# EAGLE board adapter_sf (EAGLE 5.12)
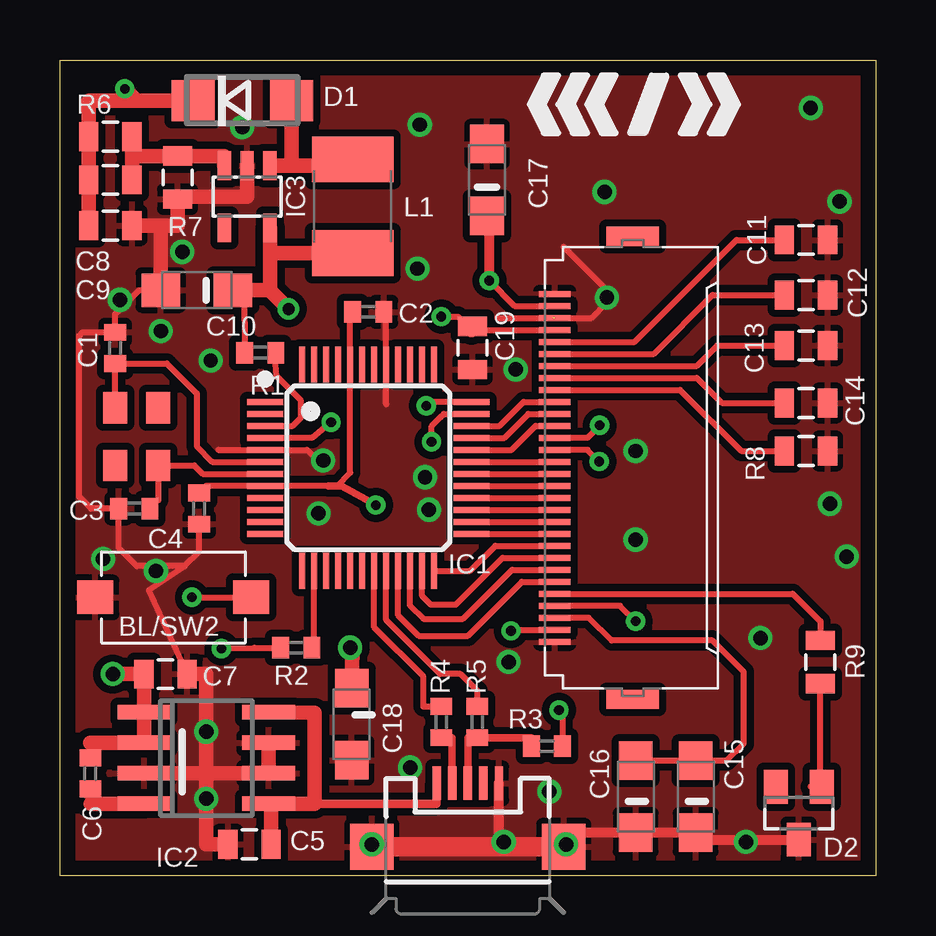
[diagram p0: board, top side]
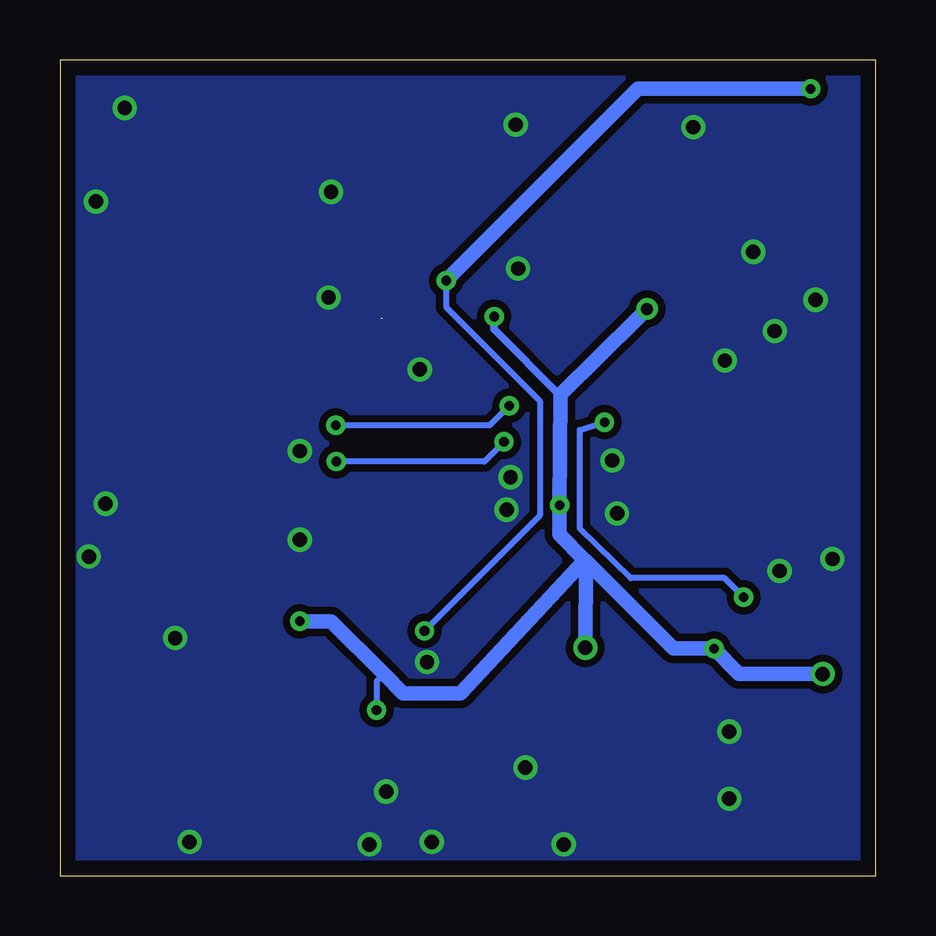
[diagram p1: board, bottom side, seen from below]

Size 34 x 34 mm. Coordinates in mm from the lower left corner, seen from the top.
Outline: 34,34 34,0 0,0 0,34 34,34
Copper layers (1*16): Top 0.035mm / dielectric 1.5mm / Bottom 0.035mm
Design rules "default *": minimum track width 9mil, minimum drill 0.4mm, track to track 8mil, track to pad 8mil, pad to pad 8mil, via to via 8mil, smd to smd 8mil, copper to edge 25mil, drill to drill 8mil, minimum pad ring 10mil, minimum via ring 8mil, stop-mask expansion 4mil, vias tented up to drill 30mil, thermal gap 10mil

## Footprints (pad centres in the part's own frame; a part is rotated, then mirrored left to right if it is on the bottom)
SWITCH_MCTAEF = smd 1.5 x 1.4: 1 -3.25,0; 2 3.25,0
C0402 = smd 0.7 x 0.9: 1 -0.65,0; 2 0.65,0
0805 = smd 0.8 x 1.2: 1 -0.9,0; 2 0.9,0
SMC_A = smd 1.6 x 1.4: + -1.5,0; - 1.5,0
DO214AC = smd 1.8 x 1.7: A 2.05,0; C -2.05,0
SOT23 = smd 1 x 1.4: 1 -0.95,-1.1; 2 0.95,-1.1; 3 0,1.1
LQFP48 = smd 1.5 x 0.25: 1 -4.3,2.75; 2 -4.3,2.25; 3 -4.3,1.75; 4 -4.3,1.25; 5 -4.3,0.75; 6 -4.3,0.25; 7 -4.3,-0.25; 8 -4.3,-0.75; 9 -4.3,-1.25; 10 -4.3,-1.75; 11 -4.3,-2.25; 12 -4.3,-2.75; 25 4.3,-2.75; 26 4.3,-2.25; 27 4.3,-1.75; 28 4.3,-1.25; 29 4.3,-0.75; 30 4.3,-0.25; 31 4.3,0.25; 32 4.3,0.75; 33 4.3,1.25; 34 4.3,1.75; 35 4.3,2.25; 36 4.3,2.75 | smd 0.25 x 1.5: 13 -2.75,-4.3; 14 -2.25,-4.3; 15 -1.75,-4.3; 16 -1.25,-4.3; 17 -0.75,-4.3; 18 -0.25,-4.3; 19 0.25,-4.3; 20 0.75,-4.3; 21 1.25,-4.3; 22 1.75,-4.3; 23 2.25,-4.3; 24 2.75,-4.3; 37 2.75,4.3; 38 2.25,4.3; 39 1.75,4.3; 40 1.25,4.3; 41 0.75,4.3; 42 0.25,4.3; 43 -0.25,4.3; 44 -0.75,4.3; 45 -1.25,4.3; 46 -1.75,4.3; 47 -2.25,4.3; 48 -2.75,4.3
SOIC8 = smd 0.6 x 2.2: 1 -1.905,-2.6; 2 -0.635,-2.6; 3 0.635,-2.6; 4 1.905,-2.6; 5 1.905,2.6; 6 0.635,2.6; 7 -0.635,2.6; 8 -1.905,2.6
SOT23-5L = smd 0.55 x 1.2: 1 -0.95,-1.3; 2 0,-1.3; 3 0.95,-1.3; 4 0.95,1.3; 5 -0.95,1.3
XF2H-3015-1LW = smd 1.3 x 0.25: 1 3.175,7.25; 2 3.175,6.75; 3 3.175,6.25; 4 3.175,5.75; 5 3.175,5.25; 6 3.175,4.75; 7 3.175,4.25; 8 3.175,3.75; 9 3.175,3.25; 10 3.175,2.75; 11 3.175,2.25; 12 3.175,1.75; 13 3.175,1.25; 14 3.175,0.75; 15 3.175,0.25; 16 3.175,-0.25; 17 3.175,-0.75; 18 3.175,-1.25; 19 3.175,-1.75; 20 3.175,-2.25; 21 3.175,-2.75; 22 3.175,-3.25; 23 3.175,-3.75; 24 3.175,-4.25; 25 3.175,-4.75; 26 3.175,-5.25; 27 3.175,-5.75; 28 3.175,-6.25; 29 3.175,-6.75; 30 3.175,-7.25 | smd 2.2 x 0.8: M1 -0.075,9.65; M2 -0.075,-9.65
L1812 = smd 1.9 x 3.4: 1 -1.95,0; 2 1.95,0
MT = smd 1.3 x 1: 1 1.2,0.9; 2 -1.2,0.9; 3 -1.2,-0.9; 4 1.2,-0.9
R0402 = smd 0.7 x 0.9: 1 -0.65,0; 2 0.65,0
USB-MICROB = smd 0.35 x 1.4: D+ 0,2.65; D- -0.65,2.65; GND 1.3,2.65; ID 0.65,2.65; VBUS -1.3,2.65 | smd 1.8 x 1.9: MT1 -4,0; MT2 4,0; MT3 -4,0; MT4 4,0

## Placement (x,y rotation side)
BL/SW2  SWITCH_MCTAEF  [SWITCH_MCTAEF]  4.72,11.6 0 top
C1  22pF  [C0402]  2.3,22 270 top
C2  100nF  [C0402]  12.85,23.5 180 top
C3  22pF  [C0402]  3.1,15.3 0 top
C4  100nF  [C0402]  5.8,15.3 90 top
C5  1µF  [0805]  7.9,1.3 180 top
C6  10nF  [C0402]  1.26,4.26 90 top
C7  1µF  [0805]  4.4,8.4 0 top
C8  220pF  [0805]  2.1,29 0 top
C9  1µF  [0805]  2.1,27.1 0 top
C10  10µF  [SMC_A]  5.7,24.4 180 top
C11  1µF  [0805]  31.1,26.5 180 top
C12  1µF  [0805]  31.1,24.2 180 top
C13  1µF  [0805]  31.1,22.1 180 top
C14  1µF  [0805]  31.1,19.7 180 top
C15  10µF  [SMC_A]  26.5,3.3 270 top
C16  10µF  [SMC_A]  24,3.3 270 top
C17  10µF  [SMC_A]  17.8,29 90 top
C18  10µF  [SMC_A]  12.16,6.31 270 top
C19  1µF  [0805]  17.2,22 270 top
D1  B140F  [DO214AC]  7.6,32.3 0 top
D2  [SOT23]  30.8,2.6 180 top
IC1  [LQFP48]  12.85,17 0 top
IC2  LT1763CS8-3.3  [SOIC8]  6.1,4.9 270 top
IC3  LM27313  [SOT23-5L]  7.8,28.3 180 top
J1  XF2-3015-1LW  [XF2H-3015-1LW]  23.8,17 180 top
L1  [L1812]  12.2,27.9 90 top
Q1  12Mhz  [MT]  3.2,18.3 270 top
R1  15k  [R0402]  8.35,21.8 180 top
R2  15k  [R0402]  9.85,9.5 180 top
R3  15k  [R0402]  20.3,5.4 0 top
R4  33R  [R0402]  15.9,6.4 270 top
R5  33R  [R0402]  17.4,6.4 270 top
R6  100k  [0805]  2.1,30.8 180 top
R7  10k  [0805]  4.9,29.1 90 top
R8  1M  [0805]  31.1,17.7 0 top
R9  50R  [0805]  31.7,8.9 270 top
X1  USB-MICROB  [USB-MICROB]  17,1.2 0 top

## Library data of the parts
BL/SW2 IC3 Q1 = seb
C1-C4 C6 C10 C15-C18 R1-R5 = rcl
C5 C7-C9 C11-C14 C19 R6-R9 X1 = SparkFun
D1 D2 = diode
IC1 = microbuilder; DIGIKEY#: 568-4945-ND; MANF: NXP; MANF#: LPC1343FBD48,151
IC2 = linear-technology
J1 = con-omron; OC_FARNELL: unknown; OC_NEWARK: unknown
L1 = resistor

## Nets
+3V3: C2.2 C4.2 C6.2 C7.1 C10.+ C18.+ C19.1 IC1.8 IC1.44 IC2.1 IC2.2 IC3.5 J1.4 J1.27 L1.1 R1.2 R2.2 R3.2
+5V: C5.1 IC2.5 IC2.8 X1.VBUS
+12V: C8.1 C9.1 C17.+ D1.C J1.2 J1.29 R6.2
BS1: IC1.35 J1.17
BS2: IC1.36 J1.18
CS: IC1.32 J1.19
D0: IC1.29 J1.14
D1: IC1.28 J1.13
D2: IC1.27 J1.12
D3: IC1.26 J1.11
D4: IC1.25 J1.10
D5: IC1.24 J1.9
D6: IC1.23 J1.8
D7: IC1.22 J1.7
D8: IC1.21 J1.6
D/C: IC1.33 J1.20
E: IC1.30 J1.15
GND: BL/SW2.1 C1.1 C2.1 C3.1 C4.1 C5.2 C7.2 C9.2 C10.- C11.1 C12.1 C13.1 C14.1 C15.- C16.- C17.- C18.- C19.2 D2.3 IC1.5 IC1.41 IC2.3 IC2.6 IC2.7 IC3.2 J1.1 J1.28 J1.30 R7.1 R8.2 X1.GND X1.MT1 X1.MT2 X1.MT3 X1.MT4
IREF: J1.22 R8.1
N$1: D1.A IC3.1 L1.2
N$2: D2.1 R9.2
N$3: C3.2 IC1.7 Q1.1
N$4: C1.2 IC1.6 Q1.3
N$5: C6.1 IC2.4
N$6: C8.2 IC3.3 R6.1 R7.2
N$7: IC1.3 R1.1
N$10: R3.1 R5.2 X1.D+
N$11: R4.2 X1.D-
N$12: IC1.14 R2.1
N$14: IC1.19 R4.1
N$21: BL/SW2.2 IC1.4
N$24: IC1.20 R5.1
R/W: IC1.31 J1.16
RES: IC1.34 J1.21
VBREF: C11.2 J1.26
VCOMH: C15.+ C16.+ J1.3
VPA: C12.2 J1.25
VPB: C13.2 J1.24
VPC: C14.2 J1.23
VSL: J1.5 R9.1

## Tracks (layer width: path | path; a pad name or v marks a point on that pad's centre or on a via)
+3V3  (via drill 0.4, 0.5, 0.6)
  Top 0.254: J1.27 17.15,22.75 16.6,23.3 v15.9,23.3 | C2.2 12.1,23.4 IC1.44 12.1,16.8 11.55,16.25 | C4.2 6.1,16.25 IC1.8 11.2,16.25 | J1.4 23.35,11.25 v24,10.6 | R2.2 8.09,9.5 v6.73,9.46 | R3.2 20.95,6.75 v20.8,6.9 | R1.2 7.67,24.43 8.82,24.32 | C6.2 1.25,4.95 1.25,5.54
  Top 0.305: 11.2,16.25 11.55,16.25 11.74,16.25 v13.17,15.45
  Top 0.6: C7.1 v2.2,8.4
  Top 0.61: 8.75,24.4 IC3.5 8.75,25.95 L1.1 | 8.75,24.4 C10.+ | IC2.1 3.6,6.8 | 1.25,5.54 IC2.2 IC2.1 | IC2.1 C7.1 | 8.75,24.4 8.82,24.32 v9.53,23.62 | C18.+ 12.2,9.4 v12.1,9.5 | 17.15,22.75 17.15,22.85 C19.1
  Bottom 0.254: v6.73,9.46 7.43,9.47 8.43,9.47 | v20.8,6.9 20.8,8.1 20.5,8.4
  Bottom 0.305: v13.17,15.45 13.17,14.35 13.18,14.22 | v15.9,23.3 15.9,22.77 13.13,20
  Bottom 0.61: v24,10.6 22.7,10.6 20.5,8.4 19.7,7.6 17.3,7.6 12.11,13.16 12.13,13.16 | v9.53,23.62 9.9,23.25 13.12,20.07 13.13,20 v13.17,15.45 13.18,14.22 12.13,13.16 | v2.2,8.4 5.7,8.4 v6.73,9.46 8.43,9.47 12.08,13.12 | 12.08,13.12 12.13,13.16 | v12.1,9.5 12.08,13.12
+5V
  Top 0.35: 10.5,3 10.62,3.53 | X1.VBUS 15.7,3 10.61,2.98
  Top 0.61: C5.1 8.8,3 IC2.5 10.5,3 10.61,2.98 10.61,6.78 IC2.8
+12V  (via drill 0.4)
  Top 0.254: J1.29 18.95,23.75 v17.9,24.8 | v18.8,10.2 18.85,10.25 J1.2
  Top 0.406: C17.+ 17.9,27.4 v17.9,24.8
  Top 0.61: C9.1 C8.1 R6.2 1.2,32.3 D1.C 3.2,32.3 v2.7,32.8
  Bottom 0.254: v18.8,10.2 17.9,11.1 13.99,15.01 13.99,19.79 17.9,23.7 v17.9,24.8
  Bottom 0.61: v2.7,32.8 9.9,32.8 v17.9,24.8
BS1  (via drill 0.4)
  Top 0.254: J1.17 21.99,17.75 v22.48,17.26 | v15.49,18.08 15.49,18.73 15.87,19.11 16.01,19.25 IC1.35
  Bottom 0.254: v22.48,17.26 16.31,17.26 v15.49,18.08
BS2  (via drill 0.4)
  Top 0.254: J1.18 21.98,18.25 v22.5,18.77 | v15.27,19.59 15.43,19.75 IC1.36
  Bottom 0.254: v22.5,18.77 16.09,18.77 v15.27,19.59
CS
  Top 0.254: J1.19 19.82,18.75 18.82,17.75 IC1.32
D0
  Top 0.254: IC1.29 J1.14
D1
  Top 0.254: IC1.28 J1.13
D2
  Top 0.254: IC1.27 J1.12
D3
  Top 0.254: IC1.26 J1.11
D4
  Top 0.254: IC1.25 J1.10
D5
  Top 0.254: J1.9 18.15,13.75 17.1,12.7 IC1.24
D6
  Top 0.254: J1.8 18.45,13.25 16.5,11.3 15.45,11.3 15.1,11.65 IC1.23
D7
  Top 0.254: J1.7 18.85,12.75 16.8,10.7 15.15,10.7 14.6,11.25 IC1.22
D8
  Top 0.254: J1.6 19.25,12.25 17,10 14.95,10 14.1,10.85 IC1.21
D/C
  Top 0.254: J1.20 19.52,19.25 18.52,18.25 IC1.33
E
  Top 0.254: IC1.30 J1.15
GND  (via drill 0.6)  (1 unrouted)
  Top 0.254: 13.6,19.65 IC1.41 13.6,23.4 C2.1 | 5.2,12.9 3.2,12.9 2.45,13.65 C3.1 1.3,15.3 0.8,15.8 0.8,22.5 0.95,22.65 C1.1 2.3,23.4 3.3,24.4 C10.- | 5.2,12.9 5.8,13.5 C4.1 | 5.2,12.9 3.7,11.9 C7.2 | J1.28 22.15,23.25 22.8,23.9 22.8,24.4 21,26.2 | 18.23,23.25 20.55,23.25 | 6.6,17.75 IC1.5 10.3,17.75 10.75,17.3 v10.97,17.3
  Top 0.406: 18.3,1.2 X1.GND | X1.MT4 21.6,1.8 C16.- C15.- 26.7,1.5 D2.3
  Top 0.61: 4.2,27.1 4.9,27.1 R7.1 4.9,28.3 7.8,28.3 IC3.2 | C10.- 4.2,27.1 | 4.2,27.1 C9.2 | C5.2 6.1,1.3 6.1,8.4 C7.2 | IC2.3 IC2.6 IC2.7
  Top 0.813: X1.MT1 18.3,1.2 X1.MT4
  other vias: 31.3,32 22.7,28.5 7.6,31.2 5.1,26 2.5,24 4.2,22.7 15,31.3 15.22,16.61 6.28,21.47 15.38,15.25 1.8,13.2 4,12.7 6.1,6 6.1,3.2 18.5,1.4 20.4,3.5 28.6,1.4 32.1,15.5 32.5,28.1 22.8,24.1 24,17.7 24,14 29.2,9.9 10.78,15.1 19,21.1 14.6,4.5 21.1,1.3 13,1.3 18.7,8.9 14.9,25.3 32.8,13.3
  pour Top (isolate 0.305): 34.5,34.5 -0.5,34.5 -0.5,-0.5 34.5,-0.5
  pour Bottom (isolate 0.305): 34.5,34.5 -0.5,34.5 -0.5,-0.5 34.5,-0.5
IREF
  Top 0.254: J1.22 25.85,20.25 28.4,17.7 R8.1
N$1
  Top 0.61: L1.2 12.2,29.6 IC3.1 9.65,29.6 D1.A
N$2
  Top 0.254: R9.2 31.7,4.1 31.3,3.7 D2.1
N$3
  Top 0.254: IC1.7 5.95,16.75 5.6,17.1 Q1.1 4.1,15.65 C3.2
N$4
  Top 0.254: IC1.6 6.35,17.25 5.7,17.9 5.7,20.1 4.45,21.35 C1.2 Q1.3
N$5
  Top 0.254: C6.1 1,3.45 1.38,3
  Top 0.61: IC2.4 1.38,3 1.27,3
N$6
  Top 0.61: IC3.3 6.85,30 R7.2 3,30 | C8.2 3,30 | 3,30 R6.1
N$7
  Top 0.254: IC1.3 9.7,18.75 10.05,19.1 10.05,19.8 9.03,20.82 8.97,21.57 R1.1
N$10
  Top 0.305: X1.D+ 17,5.75 R5.2 19.65,5.75 R3.1
N$11
  Top 0.305: X1.D- 16.35,5.75 R4.2
N$12
  Top 0.254: IC1.14 10.6,9.85 R2.1
N$14
  Top 0.254: R4.1 15.15,7.05 15.15,8.3 13.1,10.35 IC1.19
N$21  (via drill 0.4)
  Top 0.254: IC1.4 10.5,18.25 v11.3,18.9 | v5.5,11.6 BL/SW2.2
  Bottom 0.254: v11.3,18.9 12.32,18.57 12.32,14.47 10.2,12.4 6.3,12.4 v5.5,11.6
N$24
  Top 0.254: IC1.20 13.6,10.65 15.85,8.4 16.7,8.4 17.4,7.7 R5.1
R/W
  Top 0.254: IC1.31 J1.16
RES
  Top 0.254: J1.21 19.32,19.75 18.32,18.75 IC1.34
VBREF
  Top 0.254: J1.26 23.95,22.25 28.2,26.5 C11.2
VCOMH
  Top 0.254: C16.+ C15.+ 27.8,4.8 28.5,5.5 28.5,8.5 27.2,9.8 23,9.8 22.05,10.75 J1.3
VPA
  Top 0.254: J1.25 24.75,21.75 27.2,24.2 C12.2
VPB
  Top 0.254: J1.24 26.55,21.25 27.4,22.1 C13.2
VPC
  Top 0.254: J1.23 26.55,20.75 27.6,19.7 C14.2
VSL
  Top 0.254: J1.5 30.55,11.75 31.7,10.6 R9.1

## Text on the board
bStop: seb@exse.net | oled module v1